# Altium PCB ERA-51SM+.PcbDoc
Units mil, origin at the board's own origin, x right, y up, seen from the top; angles counter-clockwise.
Board outline 1245 x 1408 mil, 2 copper layers (Top Layer, Bottom Layer); 10 components, 7 nets, 30 pads, 125 vias.
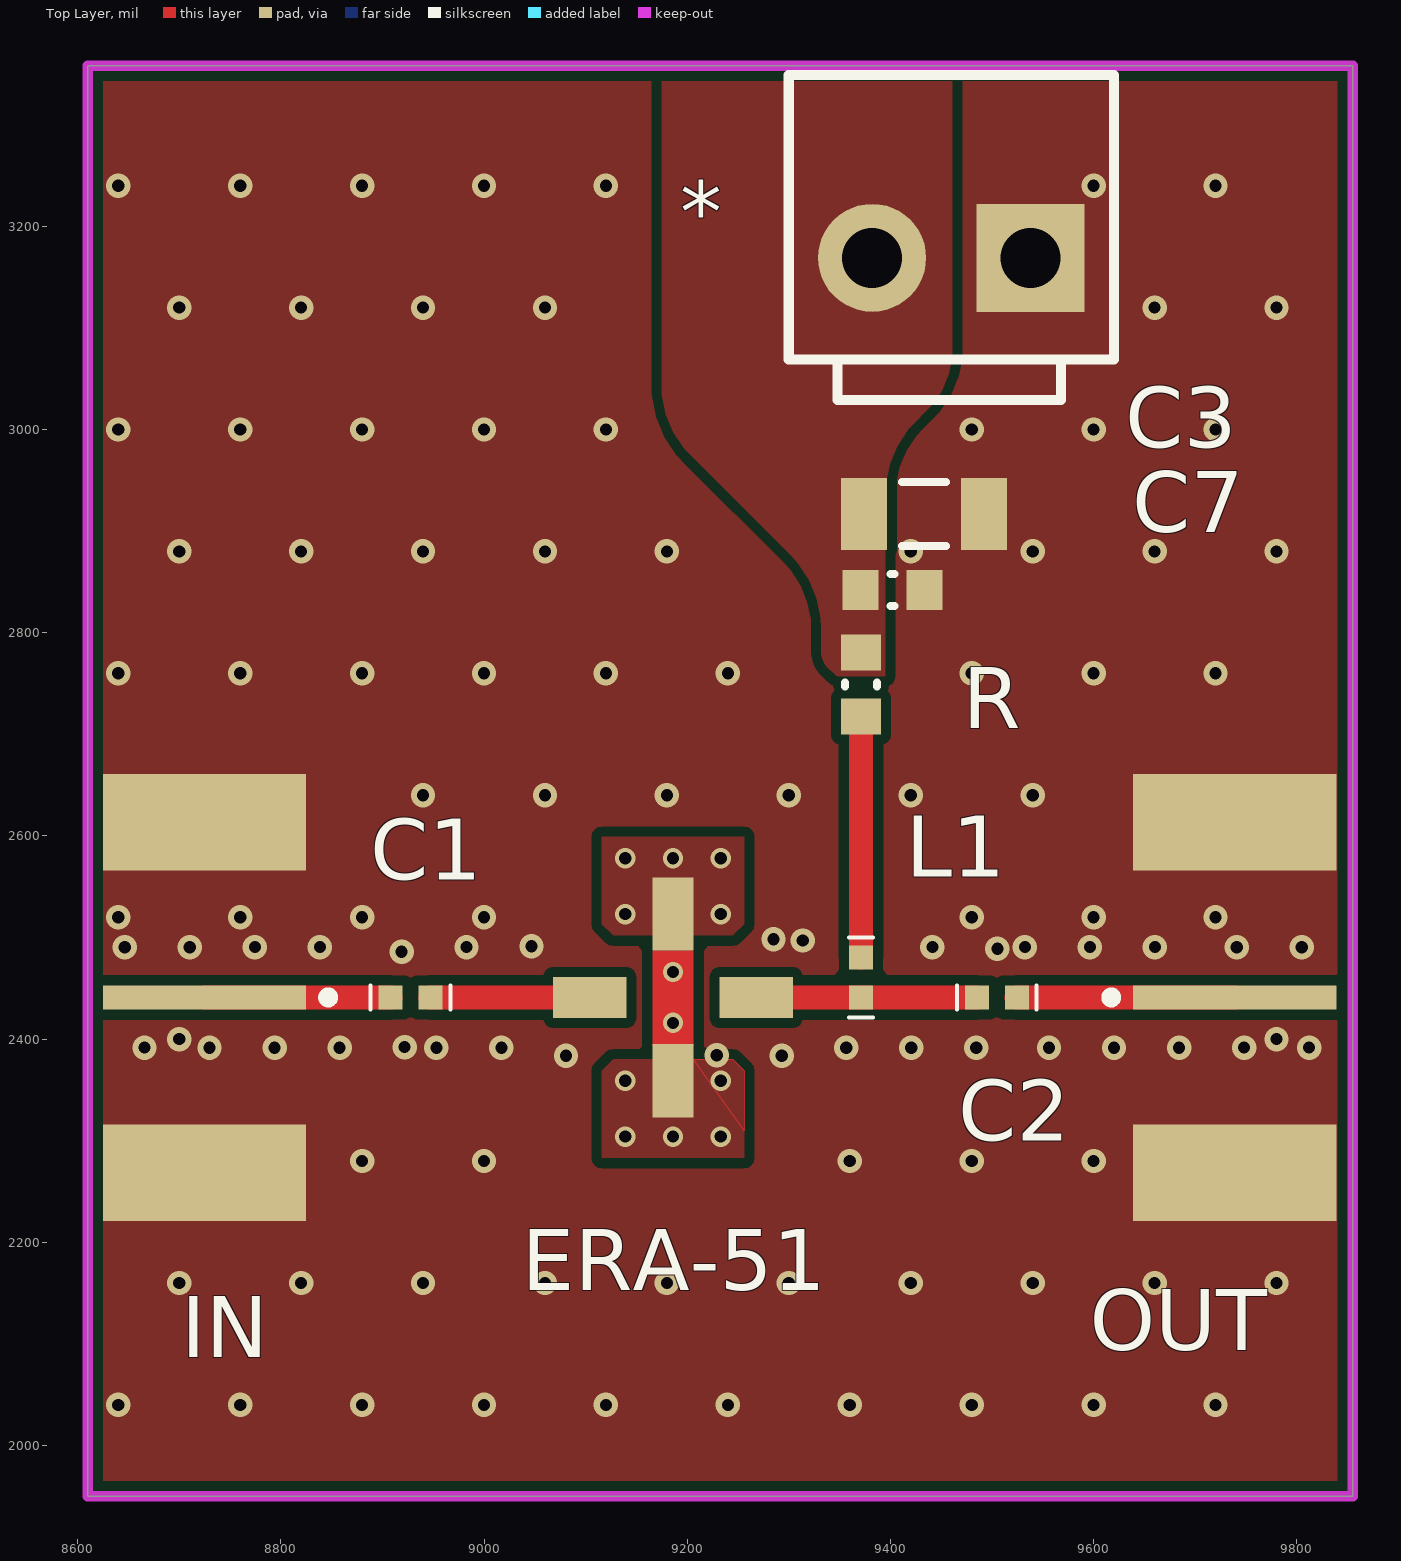
[diagram p0: Top Layer view]
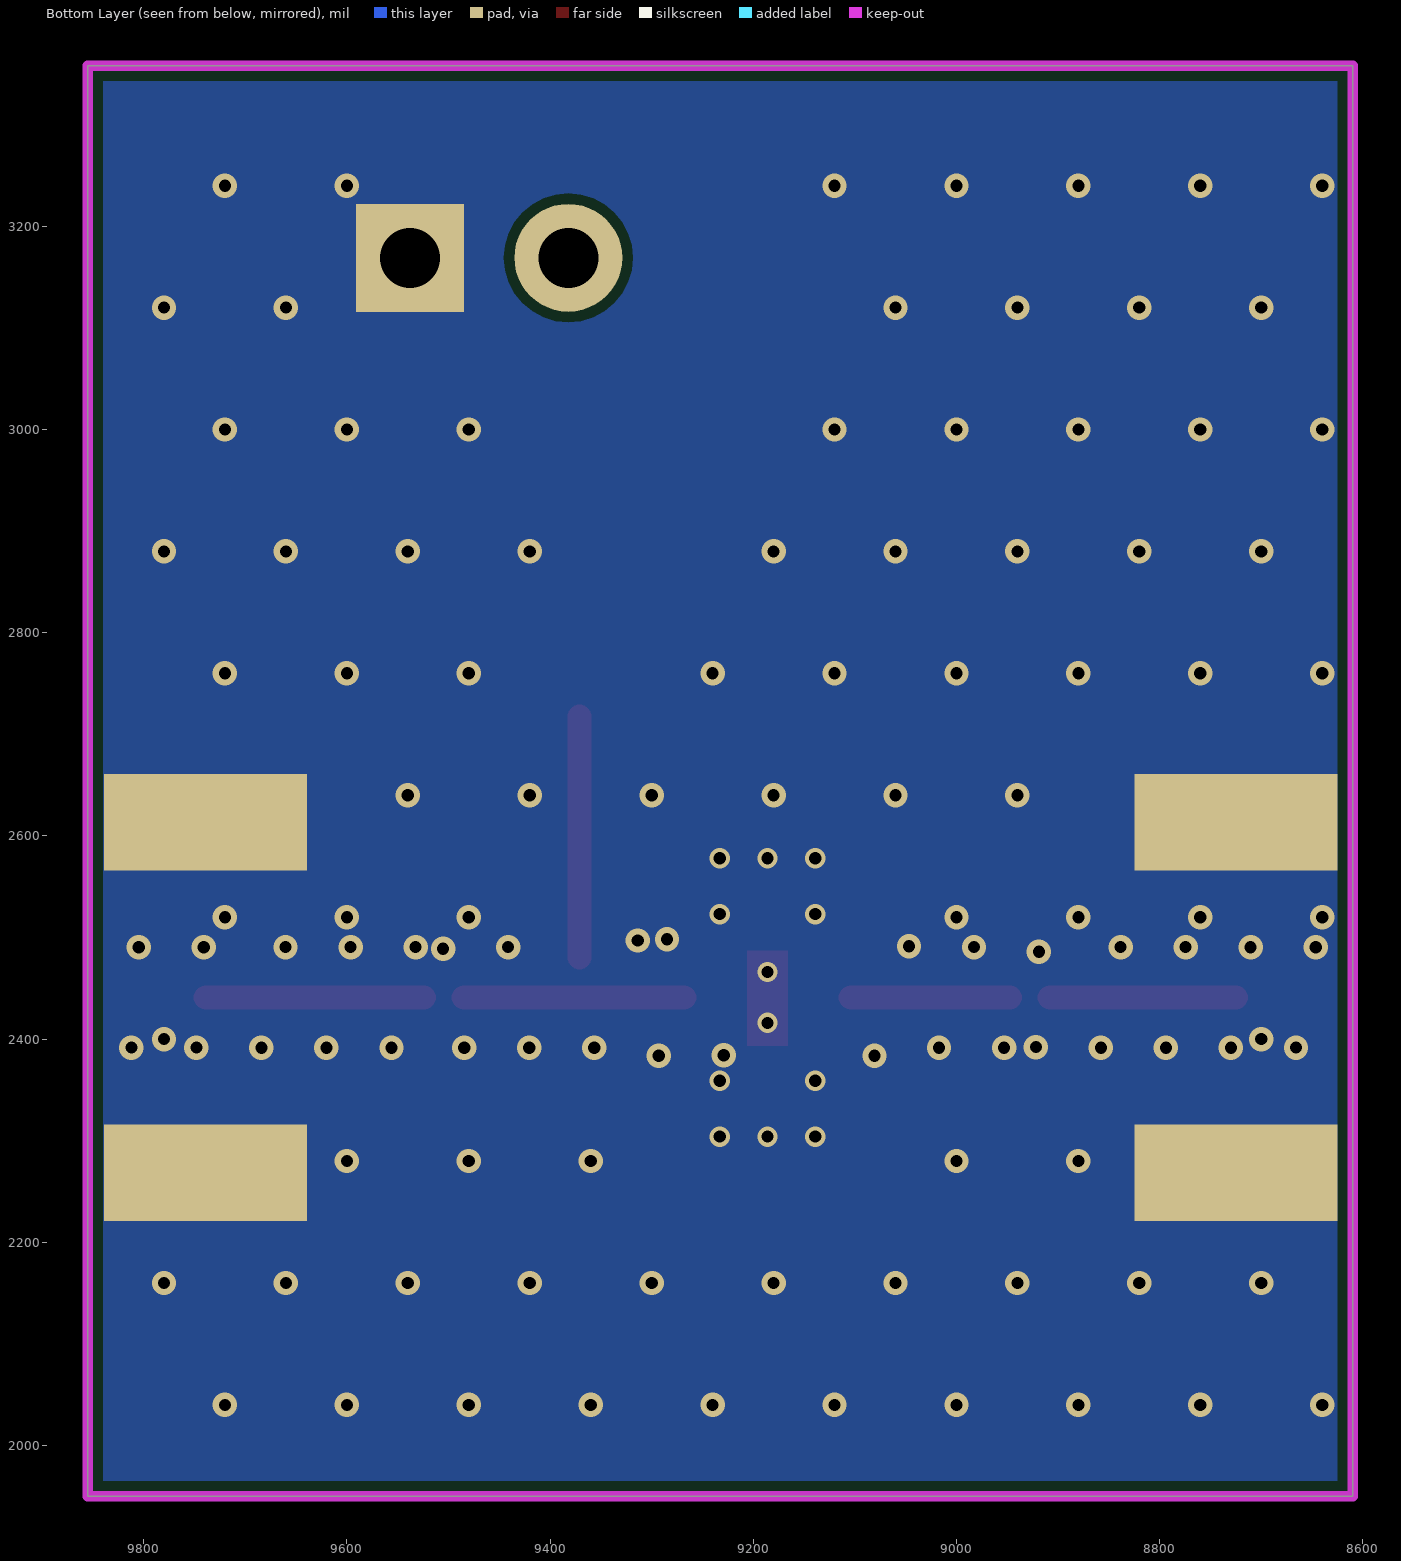
[diagram p1: Bottom Layer view, seen from below]

## Layer stack, top to bottom
Top Solder: solder mask 0.4, Solder Resist, Dk 3.5
Top Layer: signal copper 1.4
Dielectric 1: dielectric 12.6, FR-4, Dk 4.8
Bottom Layer: signal copper 1.4
Bottom Solder: solder mask 0.4, Solder Resist, Dk 3.5

## Board outline
8610,1950 8610,3358 9855,3358 9855,1950

## Design rules (kind name [scope] priority, off if disabled: settings)
Clearance [All] p1: gap=10 ignorepadtopadclearanceinfootprint=FALSE except(0: Arc-Hole Track-Hole SMDPad-Hole THPad-Hole Via-Hole Fill-Hole Poly-Hole Region-Hole Text-Hole)
PlaneConnect [All] p1: planeconnectstyle=Direct reliefexpansion=20 reliefentries=4 reliefconductorwidth=10 reliefairgap=10
PolygonConnect [All] p1: connectstyle=Direct reliefconductorwidth=10 reliefentries=4 polygonreliefangle="90 Angle" airgapwidth=10
RoutingVias [All] p1: holewidth=28 width=50 viastyle="Through Hole" minholewidth=28 minwidth=50 maxholewidth=28 maxwidth=50
SolderMaskExpansion [All] p1: expansion=4
Width [All] p1: maxlimit=24 minlimit=10 preferedwidth=24
29 further rules are at their usual default settings.

## Components (designator, comment, footprint, x,y, rotation, side; value= is the part's Value field where it differs from the comment)
* "3.96" 3.96 9460.05,3169 r180 top
C1 "6pF" 0402 8947.37,2441 r180 top
C2 "6pF" 0402 9485,2441 r0 top
C3 "6pF" 1206C 9432.94,2917 r0 top
C7 "6pF" 0603C 9402,2842 r180 top
ERA-51 "5V" WX107 9186,2441 r0 top (schematic designator GVA?)
IN "SMA" SMA 8821,2436 r0 top (schematic designator P2)
L1 "6pF" 0402 9371,2441 r90 top
OUT "SMA" SMA 9643,2446 r180 top (schematic designator P1)
R "6pF" 0603C 9371,2749 r90 top (schematic designator C4)

## Footprints (in the part's own frame and the unit in brackets; to place one, negate y for a bottom-side part, rotate by r counter-clockwise, add the part's x,y. Pads: shape width x height; smd on the part's side, far side on the other; paste and mask are expansions set on the pad)
3.96 [mm] "接插件，25V/5A"
  rect 2.7x2.7 hole 1.5: 1(-1.98,0)
  round 2.7 hole 1.5: 2(1.982,0)
  silkscreen extent -4.06,-4.57 4.07,3.56, body extent -3.98,-4.4 4.03,4.16, height 10.5
0402 [mm]
  rect 0.6x0.6 smd: 1(0,0) 2(1,0)
  silkscreen extent -0.5,-0.3 1.5,0.3
0603C [mm] "Chip Capacitor, Body 1.6x0.8mm, Height 1.0mm, IPC Medium Density"
  rect 0.9x1 smd: 1(-0.8,0) 2(0.8,0)
  silkscreen extent -0.05,-0.4 0.05,0.4, body extent -0.87,-0.48 0.88,0.47, height 1
1206C [mm] "Chip Capacitor, Body 3.2x1.6mm, Height 1mm, IPC Medium Density"
  rect 1.15x1.8 smd: 1(-1.5,0) 2(1.5,0)
  silkscreen extent -0.55,-0.8 0.55,0.8, body extent -1.7,-0.9 1.7,0.9, height 1
SMA [mil]
  rect 200x24 smd: 1(-96,5)
  rect 200x95 smd: 2(-96,-167.5) 2(-96,177.5)
  rect 200x95 smd far side: 2(-96,-167.5) 2(-96,177.5) 2(-96,177.5)
  silkscreen extent 21,0 31,10, body extent -571,-183 -9,192, height 171
WX107 [mil]
  rect 40x72 smd: G1(0,82) G2(0,-82)
  rect 72x40 smd: RF_i(-82,0) RF_o(82,0)

## Part data
C1 C2 C3 C7 L1 R: library part C, "Capacitor"
ERA-51: library part GVA-81+
IN OUT: "SMA Connector"

## Via types
v1: diameter 24, hole 12, Top Layer to Bottom Layer, tented both sides, 113 vias
v2: diameter 20, hole 12, Top Layer to Bottom Layer, tented both sides, 12 vias

## Nets (pads, with @x,y where several pads share a name; then routed paths per layer and width w, separated by ;. In a path a pad name is that pad's centre, name@x,y a point inside that pad or via, vN(x,y) a via of type N, cw(c..) or ccw(c..) an arc to the next point about the centre after c; other vN are vias at no path point)
GND: *.1 C3.2 C7.1 ERA-51.G1 ERA-51.G2 IN.2 OUT.2
  other v1: 8640,2040 8760,2040 8880,2040 9000,2040 9120,2040 9240,2040 9360,2040 9480,2040 9600,2040 9720,2040 8700,2160 8820,2160 8940,2160 9060,2160 9180,2160 9300,2160 9420,2160 9540,2160 9660,2160 9780,2160 8880,2280 9000,2280 9360,2280 9480,2280 9600,2280 9080.66,2383.68 9228.99,2384.08 9292.98,2383.68 8729.86,2391.45 8793.86,2391.45 8857.86,2391.45 8953.14,2391.45 9017.14,2391.45 9356.51,2391.45 9420.51,2391.45 9484.51,2391.45 9556.1,2391.45 9620.1,2391.45 9684.1,2391.45 8665.86,2391.68 8921.85,2392.14 9748.1,2391.68 9812.1,2391.68 8700,2400 9780,2400 8918.9,2485.96 9505.31,2489.01 8646.44,2490.32 8710.44,2490.32 9740.79,2490.32 9804.79,2490.32 8774.44,2490.55 8838.44,2490.55 8982.73,2490.55 9046.73,2491.31 9441.33,2490.55 9532.34,2490.55 9596.34,2490.55 9660.34,2490.55 9313.66,2497.05 9284.92,2498.32 8640,2520 8760,2520 8880,2520 9000,2520 9480,2520 9600,2520 9720,2520 8940,2640 9060,2640 9180,2640 9300,2640 9420,2640 9540,2640 8640,2760 8760,2760 8880,2760 9000,2760 9120,2760 9240,2760 9480,2760 9600,2760 9720,2760 8700,2880 8820,2880 8940,2880 9060,2880 9180,2880 9420,2880 9540,2880 9660,2880 9780,2880 8640,3000 8760,3000 8880,3000 9000,3000 9120,3000 9480,3000 9600,3000 9720,3000 8700,3120 8820,3120 8940,3120 9060,3120 9660,3120 9780,3120 8640,3240 8760,3240 8880,3240 9000,3240 9120,3240 9600,3240 9720,3240
  other v2: 9139,2304 9186,2304 9233,2304 9139,2359 9233,2359 9186,2416 9186,2466 9139,2523 9233,2523 9139,2578 9186,2578 9233,2578
NetC1_1: C1.1 ERA-51.RF_i | length 156.6
  Top Layer w24: C1.1 ERA-51.RF_i
NetC1_2: C1.2 IN.1 | length 183
  Top Layer w24: IN.1 C1.2
NetC2_1: C2.1 ERA-51.RF_o L1.1 | length 217
  Top Layer w24: ERA-51.RF_o L1.1 C2.1
NetC2_2: C2.2 OUT.1 | length 214.6
  Top Layer w24: C2.2 OUT.1
NetC4_1: L1.2 R.1 | length 237.1
  Top Layer w24: L1.2 R.1
VCC: *.2 C3.1 C7.2 R.2

## Polygon pours and split planes (outlines as drawn)
GND on Top Layer "Top Layer-No Net" (solid, pour order 12): 8610,3358 9855,3358 9855,1950 8610,1950
VCC on Top Layer "Top Layer-No Net" (solid, pour order 10): 9175,3354 9175,3044.42 ccw(c9275,3044.42) 9204.29,2973.71 9302.71,2875.29 cw(c9232,2804.58) 9332,2804.58 9332,2781 ccw(c9353.73,2781) 9338.36,2765.64 9345,2759 ccw(c9349.83,2763.83) 9349.83,2757 9395,2757 9395,2936.58 cw(c9495,2936.58) 9424.29,3007.29 9435,3018 ccw(c9372.23,3080.77) 9461,3080.77 9461,3356
GND on Top Layer "Top Layer-No Net" (solid, pour order 8): 9127,2502 9116,2513 9116,2599 9256,2599 9256,2513 9245,2502
GND on Top Layer "Top Layer-No Net" (solid, pour order 6): 9245,2380 9256,2369 9256,2283 9116,2283 9116,2369 9127,2380
GND on Top Layer "Top Layer-No Net" (solid, pour order 0): 9206,2380 9245,2380 9256,2369 9256,2310
GND on Bottom Layer "Top Layer-No Net" (solid, pour order 14): 8610,3358 9855,3358 9855,1950 8610,1950
GND on Top Solder "Top Layer-No Net" (solid): 9116,2599 9256,2599 9256,2513 9245,2502 9210,2502 9210,2483 9206,2483 9206,2399 9210,2399 9210,2380 9245,2380 9256,2369 9256,2283 9116,2283 9116,2369 9127,2380 9162,2380 9162,2502 9127,2502 9116,2513

## Keep-outs
Keep-Out Layer:
  the board outline again, w10

## Other copper
Top Layer:
  rectangle net GND: 9166,2393 9206,2487

## Silkscreen, mask and mechanical layers (free items; w line width, h text height)
Top Solder:
  rectangle: 8623,2625 9346,2686
  rectangle: 9396,2629 9848,2683
  rectangle: 8624,2137 9842,2231
Bottom Solder:
  rectangle: 9053,2263 9314,2622